# Altium PCB pcb.PcbDoc
Units mil, origin at the board's own origin, x right, y up, seen from the top; angles counter-clockwise.
Board outline 3040.03 x 1703.03 mil, 2 copper layers (Top Layer, Bottom Layer); 55 components, 53 nets, 260 pads, 285 vias.
Unrouted connection lines stored in the file: 9.
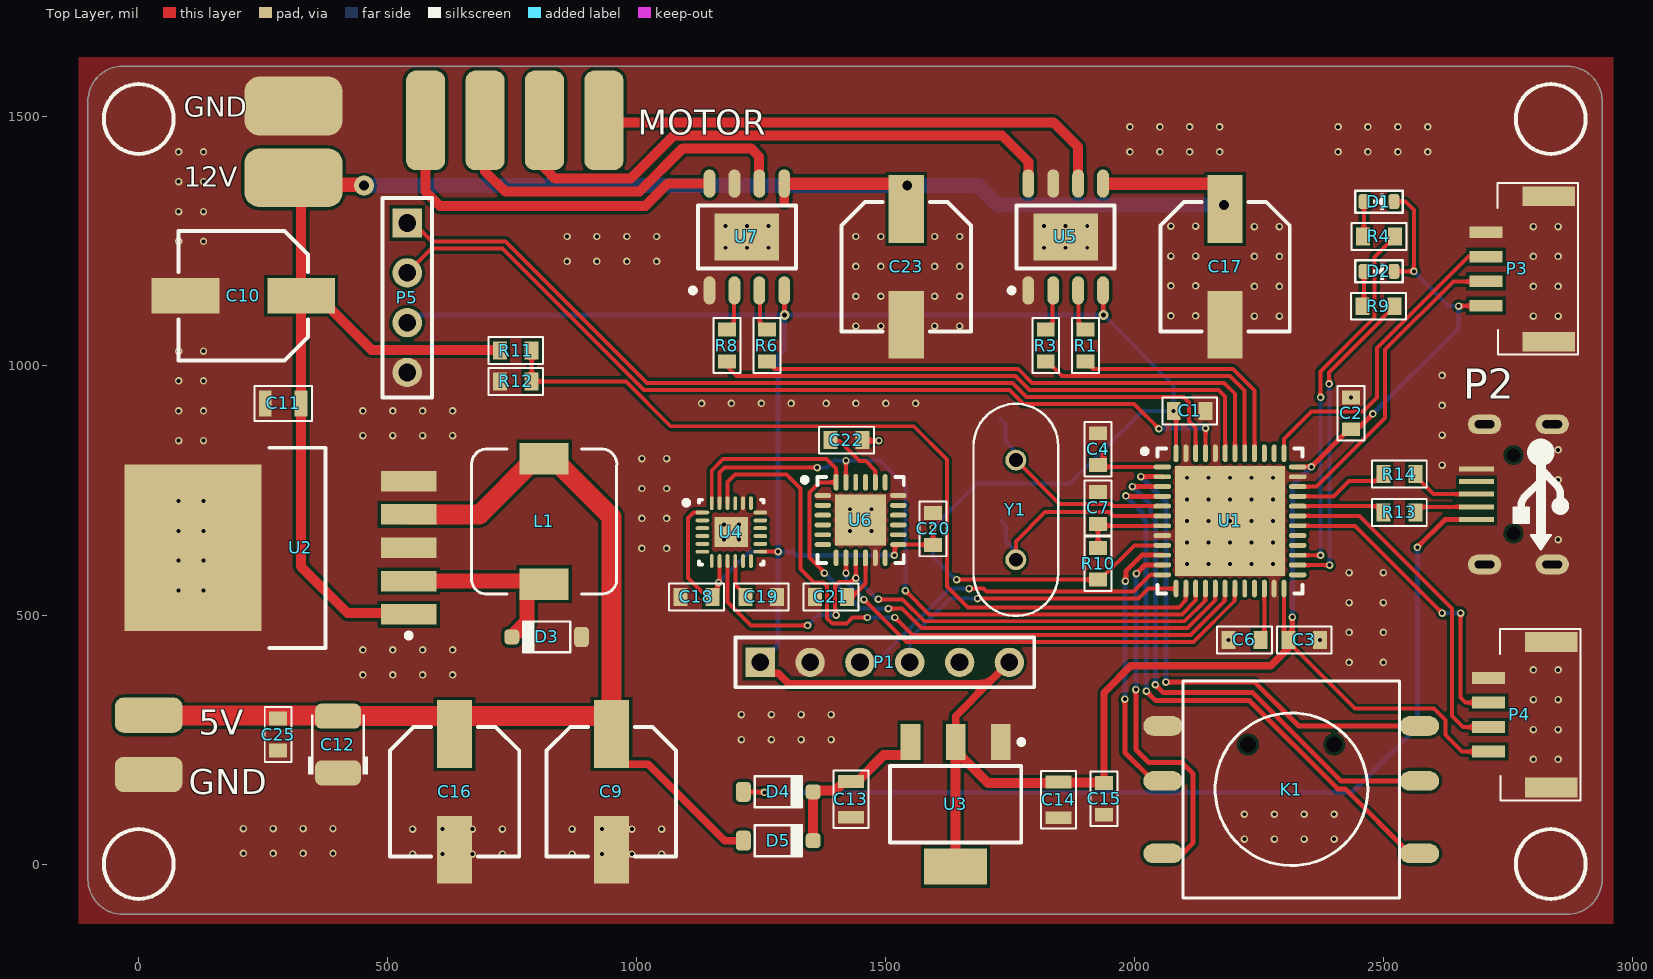
[diagram p0: Top Layer view]
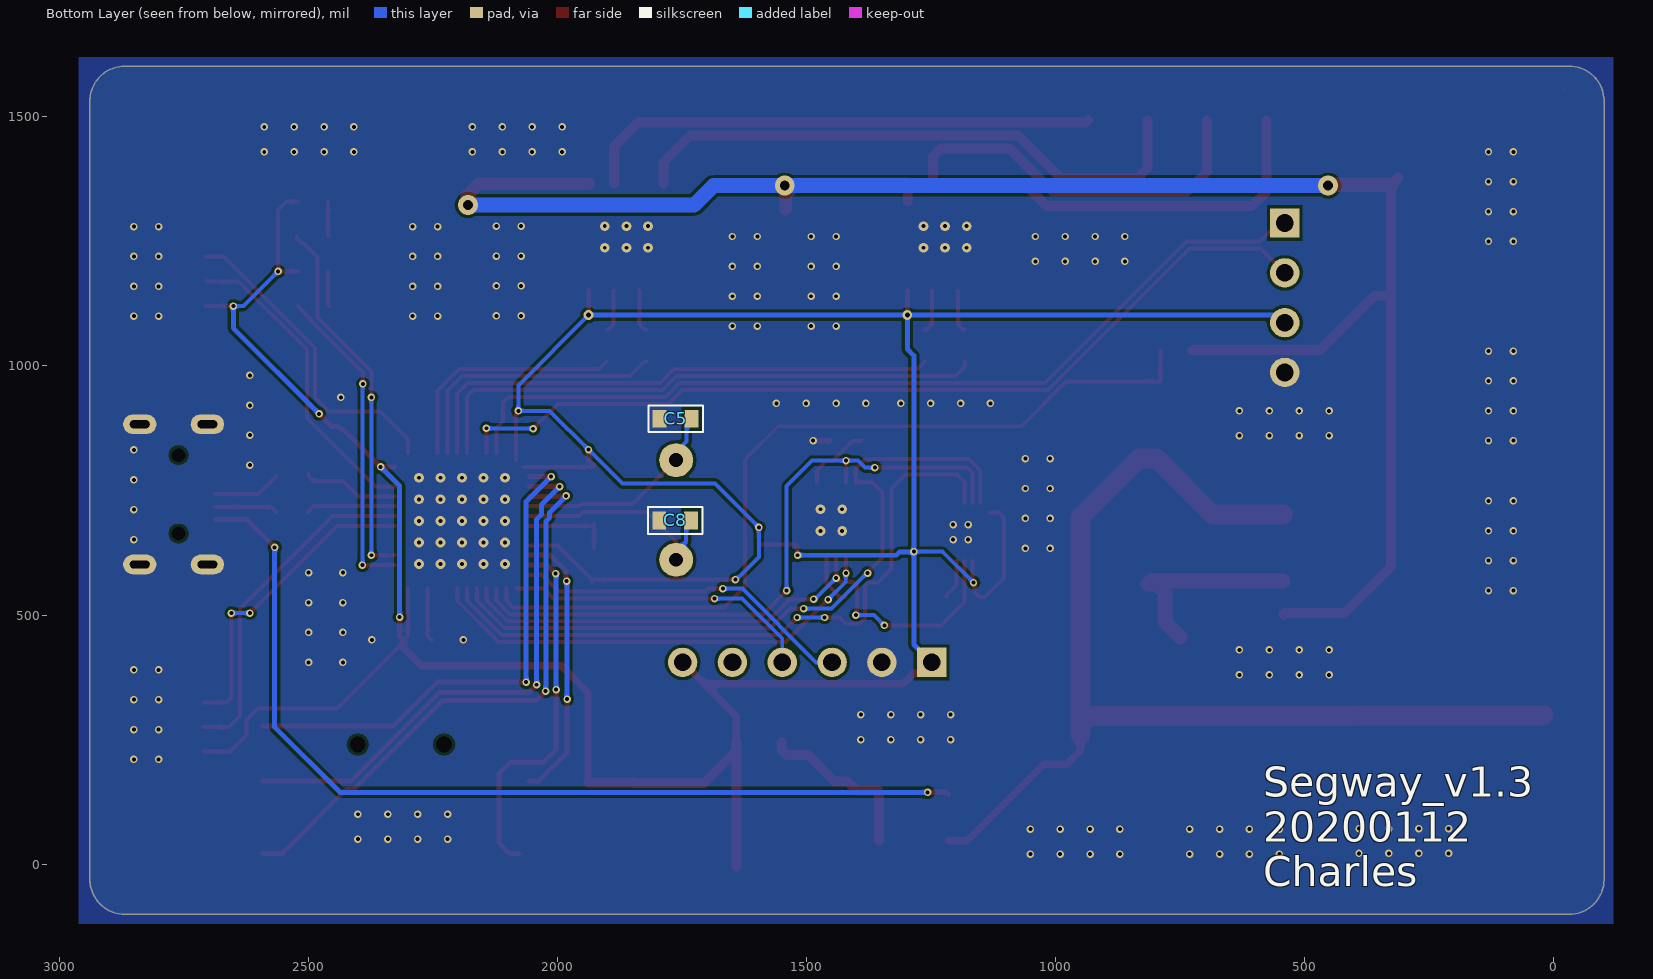
[diagram p1: Bottom Layer view, seen from below]
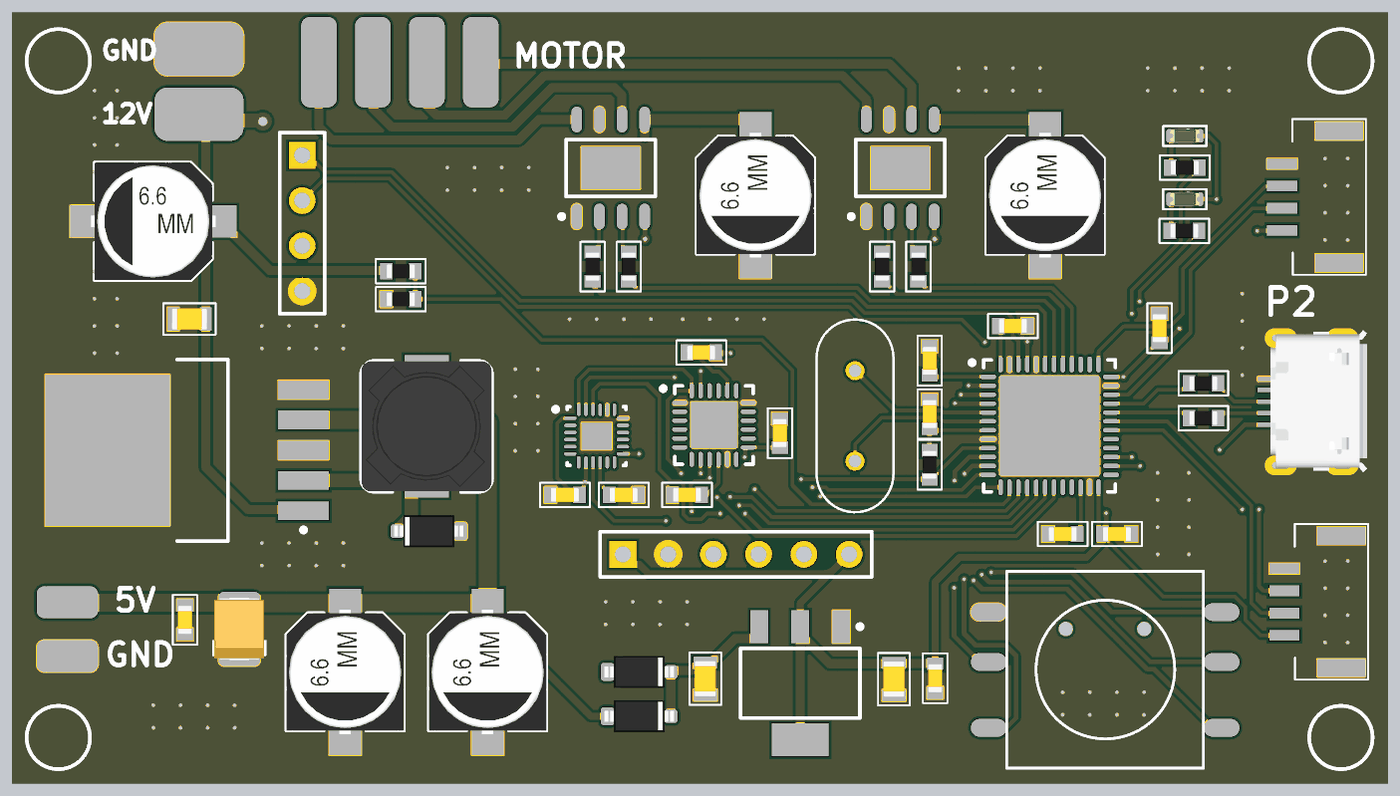
[diagram p2: 3D render of the assembled board from above, using the file's embedded part models]

## Layer stack, top to bottom
Top Solder: solder mask 0.4, Solder Resist, Dk 3.5
Top Layer: signal copper 1.4
Dielectric 1: dielectric 12.6, FR-4, Dk 4.8
Bottom Layer: signal copper 1.4
Bottom Solder: solder mask 0.4, Solder Resist, Dk 3.5

## Board outline
-102.02,-31.03 cw(c-32,-31) -102.02,-31 cw(c-99,-31) -102.02,-31 -102.02,1538 cw(c-99,1538) -101.61,1539.51 cw(c-32,1532) -32,1602.02 cw(c-32,1599) -31.97,1602.01 2868,1602.01 2868,1602.02 ccw(c2868,1599) 2867.97,1602.01 2868,1602.02 cw(c2868,1532) 2937.83,1537.03 cw(c2935,1536) 2938.02,1536 2938.02,-36 cw(c2935,-36) 2937.73,-37.27 cw(c2868,-31) 2868,-101.01 -32,-101.01 cw(c-32,-31)
cut-out: -22,1555

## Design rules (kind name [scope] priority, off if disabled: settings)
Clearance [All] p1: gap=6 ignorepadtopadclearanceinfootprint=TRUE
MinimumSolderMaskSliver [All] p1: minsoldermaskwidth=0
PolygonConnect [All] p1: connectstyle=Direct reliefconductorwidth=10 reliefentries=4 polygonreliefangle="90 Angle" airgapwidth=10
RoutingVias [All] p1: holewidth=8 width=16 viastyle="Through Hole" minholewidth=6 minwidth=12 maxholewidth=30 maxwidth=60
SilkToSilkClearance [All] p1: silktosilkclearance=1
SilkToSolderMaskClearance [IsPad] p1: minsilkscreentomaskgap=0 clearancetoexposedcopper=TRUE
SolderMaskExpansion [All] p1: expansion=2
Width [All] p1: maxlimit=50 minlimit=6 preferedwidth=8
27 further rules are at their usual default settings.

## Components (designator, comment, footprint, x,y, rotation, side; value= is the part's Value field where it differs from the comment)
C1 "CAP" CAP_0603 2110,910 r180 top value=0.1uF
C2 "CAP" CAP_0603 2434,905 r270 top value=0.1uF
C3 "CAP" CAP_0603 2340,450 r180 top value=0.1uF
C4 "CAP" CAP_0603 1926,833 r270 top value=0.1uF
C5 "CAP" CAP_0603 1762,894 r180 bottom value=20pF
C6 "CAP" CAP_0603 2220,450 r180 top value=2.2uF
C7 "CAP" CAP_0603 1926,715 r270 top value=0.1uF
C8 "CAP" CAP_0603 1763,690 r180 bottom value=20pF
C9 "470uF" "CAP ALUM 6.6MM" 949,145 r270 top value=10uF
C10 "470uF" "CAP ALUM 6.6MM" 210,1141 r180 top value=10uF
C11 "CAP" CAP_0805 290,925 r0 top value=0.1uF
C12 "CAP" CAP_TAN_B1210 400,240 r90 top value=10uF
C13 "CAP" CAP_0805 1430,130 r90 top value=0.1uF
C14 "CAP" CAP_0805 1847,129 r90 top value=200uF
C15 "CAP" CAP_0603 1938,131 r90 top value=0.1uF
C16 "470uF" "CAP ALUM 6.6MM" 634,145 r270 top value=10uF
C17 "100uF" "CAP ALUM 6.6MM" 2181,1199 r270 top
C18 "CAP" CAP_0603 1119.82,536.44 r0 top value=0.1uF
C19 "CAP" CAP_0603 1249.82,536.44 r180 top value=0.1uF
C20 "CAP" CAP_0603 1595,673 r270 top value=0.1uF
C21 "CAP" CAP_0603 1389.82,536.44 r0 top value=0.1uF
C22 "CAP" CAP_0603 1421,851 r180 top value=2.2nF
C23 "100uF" "CAP ALUM 6.6MM" 1541,1199 r270 top
C25 "CAP" CAP_0603 280,260 r90 top value=0.1uF
D1 "LED" LED_0603_GREEN 2490,1330 r180 top
D2 "LED" LED_0603_GREEN 2490,1190 r180 top
D3 "Diode" DIO_SOD-123 819,456 r180 top value=1N5819
D4 "Diode" DIO_SOD-123 1284,145 r0 top value=1N5819
D5 "Diode" DIO_SOD-123 1284,47.01 r0 top value=1N5819
K1 "BTN_NAVI" BTN_NAVI_10x10 2051.41,277.24 r0 top
L1 "IND" IND_CDRH74 814,562 r180 top value=33uH
P1 "SONIC" HDR1X6 1248,405 r0 top
P2 "USB_MICRO" USB_MICRO 2679,690.52 r270 top
P3 "CON_DEBUG_4P" CON_DEBUG_4P_STD 2705,1121 r90 top
P4 "CON_DEBUG_4P" CON_DEBUG_4P_STD 2710,225.79 r90 top
P5 "Header 4" HDR1X4 539,1287 r270 top
R1 "RES" RES_0603 1901,1041 r90 top value=2K
R3 "RES" RES_0603 1821,1041 r90 top value=2K
R4 "RES" RES_0603 2490,1260 r180 top value=10k
R6 "RES" RES_0603 1261,1041 r90 top value=2K
R8 "RES" RES_0603 1181,1041 r90 top value=2K
R9 "RES" RES_0603 2489,1120 r180 top value=10k
R10 "RES" RES_0603 1926,603 r270 top value=10K
R11 "RES" RES_0603 757,1031 r0 top value=10K
R12 "RES" RES_0603 757,969 r180 top value=2K
R13 "RES" RES_0603 2531,706 r180 top value=22
R14 "RES" RES_0603 2531,783 r180 top value=22
U1 "STM32F401CBU6" STM-UFQFPN48_N 2191,689 r0 top
U2 "LM2596" LM2596 542.07,501.14 r180 top
U3 "REG1117-3.3" TI-DCY4_N 1640,120 r270 top
U4 "MPU9250" MPU9250 1189.82,666.44 r0 top
U5 "A4950" A4950 1861,1259 r90 top
U6 "MPU6000" MPU6000 1449.35,690.65 r0 top
U7 "A4950" A4950 1221,1259 r90 top
Y1 "XTAL" XTAL_8M 1761,611 r90 top

## Footprints (in the part's own frame and the unit in brackets; to place one, negate y for a bottom-side part, rotate by r counter-clockwise, add the part's x,y. Pads: shape width x height; smd on the part's side, far side on the other; paste and mask are expansions set on the pad)
A4950 [mm] "SOIC, 8-Leads, Body 4.90x3.90mm, Pitch 1.27mm, Thermal Pad 3.30x2.40mm, IPC Medium Density"
  oval 1.45x0.6 smd: 1(-2.725,1.905) 2(-2.725,0.635) 3(-2.725,-0.635) 4(-2.725,-1.905) 5(2.725,-1.905) 6(2.725,-0.635) 7(2.725,0.635) 8(2.725,1.905)
  rect 2.4x3.3 smd: 9(0,0)
  silkscreen extent -2.85,-2.5 1.6,2.88, body extent -2,-2.5 2,2.5, height 1.7
BTN_NAVI_10x10 [mm]
  oval 2x1 smd: 1(0.127,0) 2(0.127,-2.8) 3(0.127,-6.5) 4(13.208,0) 5(13.208,-2.8) 6(13.208,-6.5)
  round 0.7 hole 0.8: 7(4.46,-0.946) 8(8.86,-0.946)
  silkscreen extent 1.14,-8.76 12.19,2.29
"CAP ALUM 6.6MM" [mm] "Aluminum Electrolytic Capacitor, Body 6.60x6.60x7.70mm, IPC Low Density"
  rect 3.45x1.8 smd: 1(-2.95,0) 2(2.95,0)
  silkscreen extent -3.3,-3.3 3.3,3.3, body extent -3.5,-3.3 3.5,3.3, height 7.7
CAP_0603 [mil]
  rect 28x36 smd: 1(-32,0) 2(32,0)
  silkscreen extent -55,-27 55,27, body extent -31,-16 32,16, height 36
CAP_0805 [mil]
  rect 26x52 smd: 1(-36,0) 2(36,0)
  silkscreen extent -58,-35 58,35, body extent -39,-24 39,24, height 50
CAP_TAN_B1210 [mil]
  rrect50% 50x92 smd: 1(-57,0) 2(57,0)
  silkscreen extent -60,-60 60,60, body extent -69,-55 69,55, height 83
CON_DEBUG_4P_STD [mm]
  rect 0.6x1.7 smd: 1(0,0) 2(1.25,0) 3(2.5,0) 4(3.75,0)
  rect 1x2.7 smd: 5(-1.829,-3.2) 5(5.588,-3.2)
  silkscreen extent -2.49,-4.7 6.26,-0.58
DIO_SOD-123 [mil]
  rrect50% 30x40 smd: 1(-70,0)
  rrect50% 30x30 smd: 2(70,0)
  silkscreen extent -47,-31 47,31, body extent -77,-35 77,35, height 46
HDR1X4 [mm] "Connector; Header; 4 Position"
  rect 1.5x1.5 hole 0.9: 1(0,0)
  round 1.5 hole 0.9: 2(2.54,0) 3(5.08,0) 4(7.62,0)
  silkscreen extent -1.27,-1.27 8.89,1.27
HDR1X6 [mm] "Connector; Header; 6 Position"
  rect 1.5x1.5 hole 0.9: 1(0,0)
  round 1.5 hole 0.9: 2(2.54,0) 3(5.08,0) 4(7.62,0) 5(10.16,0) 6(12.7,0)
  silkscreen extent -1.27,-1.27 13.97,1.27
IND_CDRH74 [mm] "DIY"
  rect 2.5x1.6 smd: 1(0,0) 2(0,-6.401)
  silkscreen extent -3.71,-6.9 3.71,0.51, body extent -3.65,-6.85 3.65,0.45, height 4.5
LED_0603_GREEN [mil]
  rrect50% 22x30 smd: 1(-30,0) 2(30,0)
  silkscreen extent -48,-22 48,22, body extent -32,-16 32,16, height 24
LM2596 [mm] "TO-263-6, D2-PAK, 6-Pads, Body 7.43x8.46mm (max), IPC Medium Density"
  rect 2.85x1.05 smd: 1(0,0) 2(0,-1.7) 3(0,-3.4) 4(0,-5.1) 5(0,-6.8)
  rect 7x8.5 smd: 6(11,-3.4)
  silkscreen extent -0.13,-8.5 7.1,1.7, body extent 4.25,-8.5 12.9,1.7, height 4.6
MPU6000 [mm] "QFN, 24-Leads, Body 4.00x4.00mm, Pitch 0.50mm, Thermal Pad 2.60x2.60mm, IPC Medium Density"
  oval 0.85x0.25 smd: 1(-1.925,1.25) 2(-1.925,0.75) 3(-1.925,0.25) 4(-1.925,-0.25) 5(-1.925,-0.75) 6(-1.925,-1.25) 13(1.925,-1.25) 14(1.925,-0.75) 15(1.925,-0.25) 16(1.925,0.25) 17(1.925,0.75) 18(1.925,1.25)
  oval 0.25x0.85 smd: 7(-1.25,-1.925) 8(-0.75,-1.925) 9(-0.25,-1.925) 10(0.25,-1.925) 11(0.75,-1.925) 12(1.25,-1.925) 19(1.25,1.925) 20(0.75,1.925) 21(0.25,1.925) 22(-0.25,1.925) 23(-0.75,1.925) 24(-1.25,1.925)
  rect 2.6x2.6 smd: 25(0,0)
  silkscreen extent -2.97,-2.2 2.2,2.2, body extent -2.05,-2.05 2.05,2.05, height 0.9
MPU9250 [mm] "QFN127P600-8N"
  oval 0.7x0.2 smd: 1(-1.475,1) 2(-1.475,0.6) 3(-1.475,0.2) 4(-1.475,-0.2) 5(-1.475,-0.6) 6(-1.475,-1) 13(1.475,-1) 14(1.475,-0.6) 15(1.475,-0.2) 16(1.475,0.2) 17(1.475,0.6) 18(1.475,1)
  oval 0.2x0.7 smd: 7(-1,-1.475) 8(-0.6,-1.475) 9(-0.2,-1.475) 10(0.2,-1.475) 11(0.6,-1.475) 12(1,-1.475) 19(1,1.475) 20(0.6,1.475) 21(0.2,1.475) 22(-0.2,1.475) 23(-0.6,1.475) 24(-1,1.475)
  rect 1.7x1.54 smd: 25(0,0)
  silkscreen extent -2.42,-1.65 1.65,1.65, body extent -1.5,-1.5 1.5,1.5, height 1
RES_0603 [mil]
  rect 28x36 smd: 1(-32,0) 2(32,0)
  silkscreen extent -55,-27 55,27, body extent -31,-16 32,16, height 20
STM-UFQFPN48_N [mm] "QFN, 48-Leads, Body 7.1x7.1mm, Pitch 0.5mm, Thermal Pad 5.6x5.6mm, IPC Medium Density"
  oval 0.9x0.25 smd: 1(-3.45,2.75) 2(-3.45,2.25) 3(-3.45,1.75) 4(-3.45,1.25) 5(-3.45,0.75) 6(-3.45,0.25) 7(-3.45,-0.25) 8(-3.45,-0.75) 9(-3.45,-1.25) 10(-3.45,-1.75) 11(-3.45,-2.25) 12(-3.45,-2.75) 25(3.45,-2.75) 26(3.45,-2.25) 27(3.45,-1.75) 28(3.45,-1.25) 29(3.45,-0.75) 30(3.45,-0.25) 31(3.45,0.25) 32(3.45,0.75) 33(3.45,1.25) 34(3.45,1.75) 35(3.45,2.25) 36(3.45,2.75)
  oval 0.25x0.9 smd: 13(-2.75,-3.45) 14(-2.25,-3.45) 15(-1.75,-3.45) 16(-1.25,-3.45) 17(-0.75,-3.45) 18(-0.25,-3.45) 19(0.25,-3.45) 20(0.75,-3.45) 21(1.25,-3.45) 22(1.75,-3.45) 23(2.25,-3.45) 24(2.75,-3.45) 37(2.75,3.45) 38(2.25,3.45) 39(1.75,3.45) 40(1.25,3.45) 41(0.75,3.45) 42(0.25,3.45) 43(-0.25,3.45) 44(-0.75,3.45) 45(-1.25,3.45) 46(-1.75,3.45) 47(-2.25,3.45) 48(-2.75,3.45)
  rect 5.6x5.6 smd: 49(0,0)
  silkscreen extent -4.47,-3.7 3.7,3.7, body extent -3.55,-3.55 3.55,3.55, height 0.6
TI-DCY4_N [mm] "SOT223, 4-Leads, Body 6.5x3.5mm, Pitch 2.3mm, IPC Medium Density"
  rect 1.85x1 smd: 1(-3.175,2.3) 2(-3.175,0) 3(-3.175,-2.3)
  rect 1.85x3.2 smd: 4(3.175,0)
  silkscreen extent -3.3,-3.35 1.95,3.48, body extent -1.85,-3.35 1.85,3.35, height 1.8
USB_MICRO [mil]
  rect 10x70 smd: 1(-1,7) 2(-26.59,7) 3(-52.18,7) 4(-77.77,7) 5(-102.18,7)
  oval 39.37x66.93 hole 15.75 slot 39.37 at 90 deg: 5(-192.5,159) 5(-192.5,23.17) 5(89,159) 5(89,23.17)
  round 0 hole 27.56: ""(-130.48,81) ""(27,81)
  silkscreen extent -146,82 58,183, body extent -210,0 104,214, height 107
XTAL_8M [mil]
  round 42 / inner round 68 / far side round 68 hole 28: 1(0,0) 2(200,0)
  silkscreen extent -113,-85 313,85

## Part data
C1 C2 C3 C4 C5 C6 C7 C8 C11 C12 C13 C14 C15 C18 C19 C20 C21 C22 C25: "Capacity"
C9 C10 C16: library part CAP_POL, "SMT Polarised Capacitor"
C17 C23: library part CAP_POL, "SMT Polarised Capacitor", Voltage=50V
L1: "Inductor"
P1: library part "Header 6", "Header, 6-Pin", LatestRevisionDate=17-Jul-2002, LatestRevisionNote="Re-released for DXP Platform.", Publisher="Altium Limited"
P5: "Header, 4-Pin", LatestRevisionDate=17-Jul-2002, LatestRevisionNote="Re-released for DXP Platform.", Publisher="Altium Limited"
R1 R3 R4 R6 R8 R9 R10 R11 R12 R13 R14: "Resister"
U1: "ARM Cortex-M4 32-bit MCU+FPU, 105 DMIPS, 128 kB Flash, 64 kB Internal RAM, 36 I/Os, 48-pin UFQFPN, -40 to 85 degC, Tray", I/Os (High Current)=36, Manufacturer=STMicroelectronics, Operating Frequency(F) (Processor speed) (MHz)=84, Supplier Part Number 1=19X6215, Supply Voltage(Vcc) max (V)=3.6, Supply Voltage(Vcc) min (V)=1.8, ComponentLink1Description="Manufacturer URL", ComponentLink1URL=http://www.st.com/web/en/home.html, ComponentLink2Description=Datasheet, ComponentLink2URL=http://www.st.com/st-web-ui/static/active/en/resource/technical/document/data_brief/DM00071938.pdf, ComponentLink3Description="Package Specification", ComponentLink3URL=http://www.st.com/st-web-ui/static/active/en/resource/technical/document/data_brief/DM00071938.pdf, Core="ARM Cortex-M4", DatasheetVersion="Rev. 1", FLASH Size (Prog) (kB)=128, Internal RAM Size (kB)=64, Mounting Technology="Surface Mount", PackageDescription="48-Pin Ultra Thin Fine Pitch Quad Flat No-Lead, 7 x 7 x 0.6 mm Body, 0.5 mm Pitch, Exposed Pad", PackageReference=UFQFPN48, PackageVersion="Rev. 1, 04/2013", Packing=Tray, PartNumber=STM32F401CBU6, Supplier 1=Newark, Supplier 2=Mouser, Supplier Part Number 2=511-STM32F401CBU6
U2: "Power"
U3: "Single Output LDO, 800 mA, Fixed 3.3 V Output, 3.8 to 15 V Input, with Internal Current Limiting, 4-pin SOT-223 (DCY), -40 to 125 degC, Green (RoHS & no Sb/Br)", Manufacturer="Texas Instruments", Rating=Catalog, Supplier Part Number 1=REG1117-3.3-ND, Code_JEDEC=TO-261, ComponentLink1Description="Manufacturer URL", ComponentLink1URL=http://www.ti.com/, ComponentLink2Description=Datasheet, ComponentLink2URL=http://www.ti.com/general/docs/lit/getliterature.tsp?genericPartNumber=REG1117-33&fileType=pdf, ComponentLink3Description="Package Specification", ComponentLink3URL=http://www.ti.com/litv/pdf/mpds094a, DatasheetVersion=SBVS001D, Eco-Plan="Green (RoHS & no Sb/Br)", Fixed Output Options(V)=5, Iout(Max)(A)=0.8, Iq(Typ)(mA)=4, Mounting Technology="Surface Mount", PackageDescription="4-Pin Plastic Small Outline, Body 3.5 x 6.5 mm, Pitch 2.3 mm", PackageReference=DCY4, PackageVersion=4202506/B, PartNumber=REG1117-3.3, SubFamily="Single Channel LDO", Supplier 1=Digi-Key, Supplier 2=Farnell, Supplier 3=Farnell, Supplier 4=Newark, Supplier 5=Mouser, Supplier Part Number 2=1212355, Supplier Part Number 3=2126471, Supplier Part Number 4=35C1963, Supplier Part Number 5=595-REG1117-3.3, Vdo(Typ)(mV)=1100, Vin(Max)(V)=15, Vin(Min)(V)=3.8, Vout Adj(Max)(V)=3.3, Vout Adj(Min)(V)=3.3
U4: "Sensor"
U5 U7: "Dual N-MOS, 40V, 3.5A."
U6: "IMU 6axis, (?????????)"
Y1: Frequency=8M

## Free pads (board coordinates)
  rrect50% 135.83x70.87 smd: ""(20,180) ""(20,299)
  rrect50% 196.85x118.11 smd: ""(311,1378) ""(311,1522)
  rrect50% 78.74x200 smd: ""(576,1493) ""(695.33,1493) ""(814.67,1493) ""(934,1493)

## Via types
v1: diameter 15, hole 8, Top Layer to Bottom Layer, tented both sides, 235 vias
v2: diameter 19.68, hole 7.87, Top Layer to Bottom Layer, tented both sides, 41 vias
v3: diameter 15, hole 7.87, Top Layer to Bottom Layer, tented both sides, 4 vias
v4: diameter 40, hole 20, Top Layer to Bottom Layer, tented both sides, 3 vias
v5: diameter 20, hole 10, Top Layer to Bottom Layer, tented both sides, 2 vias

## Nets (pads, with @x,y where several pads share a name; then routed paths per layer and width w, separated by ;. In a path a pad name is that pad's centre, name@x,y a point inside that pad or via, vN(x,y) a via of type N, cw(c..) or ccw(c..) an arc to the next point about the centre after c; other vN are vias at no path point)
ADC_BATT: R11.2 R12.1 U1.14 | length 1742.1
  Top Layer w8: R11.2 R12.1 977.9,969 1067.9,879 1556,879 1623,812 1623,557 1664.5,515.5 2088.36,515.5 2102.06,529.2 2102.06,552.82 U1.14
BTN_1: K1.2 U1.10 | length 551.6
  Top Layer w10: v1(1980,331) 1980,223.73 2036.72,167.01 K1.2 ; v1(1981,568.07) 1981.96,569.03 1981.96,588.12 2013.94,620.1 U1.10
  Bottom Layer w10: v1(1980,331) 1980.5,331.5 1980.5,567.57 v1(1981,568.07)
BTN_2: K1.3 U1.11 | length 736.2
  Top Layer w10: v1(2002,350) 2002,230 2028,204 2094,204 2117,181 2117,42.47 2095.87,21.34 K1.3@2076.18,21.34 ; v1(2003,583) 2020.42,600.42 U1.11
  Bottom Layer w10: v1(2002,350) 2002,582 v1(2003,583)
BTN_3: K1.4 U1.2 | length 1042.5
  Top Layer w10: v1(2012,778) 2012.34,777.66 2055.09,777.66 U1.2 ; v1(2062,365.16) 2240.84,365.16 2328.76,277.24 K1.4@2591.18,277.24
  Bottom Layer w10: v1(2012,778) 2062,728 v1(2062,365.16)
BTN_4: K1.5 U1.3 | length 1107.4
  Top Layer w10: v1(1995,758) 1995.05,757.95 2055.12,757.95 U1.3 ; v1(2041,360) 2056.96,344.04 2236.58,344.04 2413.62,167.01 K1.5@2591.18,167.01
  Bottom Layer w10: v1(1995,758) 2031,722 2031,702 2041,692 v1(2041,360)
BTN_5: K1.6 U1.4 | length 1185.6
  Top Layer w10: v1(1982,739) 1982.71,738.29 2055.09,738.29 U1.4 ; v1(2023,347) 2042,328 2230,328 2406.99,151.01 2422.06,151.01 2551.72,21.34 K1.6@2591.18,21.34
  Bottom Layer w10: v1(1982,739) 2015,706 2015,695.37 2022.5,687.87 2022.5,347.5 v1(2023,347)
GND: C1.1 C2.1 C3.1 C4.1 C5.1 C6.2 C7.1 C8.1 C9.2 C10.2 C11.1 C12.1 C13.1 C14.1 C15.1 C16.2 C17.2 C18.1 C19.1 C20.1 C21.1 C22.1 C23.2 C25.1 D3.1 K1.1 P1.2 P2.5 P3.4 P3.5 P4.4 P4.5 P5.4 pad.@20,180 pad.@311,1522 R12.2 U1.8 U1.23 U1.35 U1.44 U1.47 U1.49 U2.3 U2.5 U2.6 U3.1 U4.18 U4.20 U4.25 U5.1 U5.7 U5.9 U6.1 U6.11 U6.18 U6.25 U7.1 U7.7 U7.9 | length 35.1
  Top Layer w10: C22.1 1456,848 1458,850 v1(1486,850)
  other v1: 550,20 610,20 670,20 730,20 870,20 930,20 990,20 1050,20 210,21.34 270,21.34 330,21.34 390,21.34 2220,50 2280,50 2340,50 2400,50 550,70 610,70 670,70 730,70 870,70 930,70 990,70 1050,70 210,71.34 270,71.34 330,71.34 390,71.34 2220,100 2280,100 2340,100 2400,100 2800,210 2850,210 1210,250 1270,250 1330,250 1390,250 2800,270 2850,270 1210,300 1270,300 1330,300 1390,300 2800,330 2850,330 450,380 510,380 570,380 630,380 2800,390 2850,390 2430,405 2499,405 450,430 510,430 570,430 630,430 2188,450 2372,450 2430,465 2499,465 2430,525 2499,525 80,549 130,549 2430,585 2499,585 80,609 130,609 1010,634 1060,634 2850,651.44 80,669 130,669 1010,694 1060,694 2850,711.44 80,729 130,729 1010,754 1060,754 2850,771.44 2617,801 1010,814 1060,814 2850,831.44 80,850 130,850 450,860 510,860 570,860 630,860 2617,861 80,910 130,910 450,910 510,910 570,910 630,910 2617,921 1130,925 1190,925 1250,925 1310,925 1380,925 1440,925 1500,925 1560,925 2434,937 80,970 130,970 2617,981 80,1030 130,1030 1440,1080 1490,1080 1598,1080 1648,1080 2240,1100 2290,1100 2800,1100 2850,1100 2072.1,1100.65 2122.1,1100.65 1440,1140 1490,1140 1598,1140 1648,1140 2240,1160 2290,1160 2800,1160 2850,1160 2072.1,1160.65 2122.1,1160.65 1440,1200 1490,1200 1598,1200 1648,1200 860,1210 920,1210 980,1210 1040,1210 2240,1220 2290,1220 2800,1220 2850,1220 2072.1,1220.65 2122.1,1220.65 80,1250 130,1250 860,1260 920,1260 980,1260 1040,1260 1440,1260 1490,1260 1598,1260 1648,1260 2240,1280 2290,1280 2800,1280 2850,1280 2072.1,1280.65 2122.1,1280.65 80,1310 130,1310 80,1370 130,1370 80,1430 130,1430 1990,1430 2050,1430 2110,1430 2170,1430 2408,1430 2468,1430 2528,1430 2588,1430 1990,1480 2050,1480 2110,1480 2170,1480 2408,1480 2468,1480 2528,1480 2588,1480
  other v2: 2104.39,602.39 2147.69,602.39 2191,602.39 2234.31,602.39 2277.61,602.39 2104.39,645.69 2147.69,645.69 2191,645.69 2234.31,645.69 2277.61,645.69 1427.69,669 1471,669 2104.39,689 2147.69,689 2191,689 2234.31,689 2277.61,689 1427.69,712.31 1471,712.31 2104.39,732.31 2147.69,732.31 2191,732.31 2234.31,732.31 2277.61,732.31 2104.39,775.61 2147.69,775.61 2191,775.61 2234.31,775.61 2277.61,775.61 1177.69,1237.35 1221,1237.35 1264.31,1237.35 1817.69,1237.35 1861,1237.35 1904.31,1237.35 1177.69,1280.65 1221,1280.65 1264.31,1280.65 1817.69,1280.65 1861,1280.65 1904.31,1280.65
  other v3: 1174.82,651.44 1204.82,651.44 1174.82,681.44 1204.82,681.44
I2C_SCL: P5.2 U1.45 | length 1823.9
  Top Layer w8: P5.2 588,1236 730.7,1236 1014.7,952 1748.4,952 1776.4,924 1998,924 v1(2048,874) ; U1.45 2141.89,824.93 2141.89,874.89 v1(2142,875)
  Bottom Layer w8: v1(2048,874) 2048.5,874.5 2141.5,874.5 v1(2142,875)
I2C_SDA: P5.1 U1.46 | length 1826.7
  Top Layer w8: P5.1 552,1287 589,1250 736.5,1250 1020.5,966 1754.2,966 1782.2,938 2098,938 2109,927 2109,889.11 2122.1,876.01 U1.46
IMU_CLK: U1.15 U4.23 U6.23 | length 1357.2
  Top Layer w8: U4.23 1166.13,724.57 1166.13,786.13 1176,796 v1(1362,796) ; U6.23 1419.91,766.53 1419.91,809.91 v1(1420,810) ; v1(1539,549) 1586.5,501.5 2094.16,501.5 2122.1,529.44 U1.15
  Bottom Layer w8: v1(1362,796) 1382,796 1396,810 v1(1420,810) 1488,810 1539,759 v1(1539,549)
IMU_CS_1: U1.18 U4.22 | length 1377.8
  Top Layer w8: U4.22 1181.95,766.95 1197,782 1301,782 1329,754 1329,592 1355.5,565.5 1374.9,565.5 1381.82,558.58 1381.82,493.43 1392.75,482.5 1420.68,482.5 1433.18,495 v1(1463,495) ; v1(1518,495) 1553.5,459.5 2111.56,459.5 2180.8,528.75 2180.8,552.82 U1.18
  Bottom Layer w8: v1(1463,495) v1(1518,495)
IMU_CS_2: U1.19 U6.8 | length 937.9
  Top Layer w8: U6.8 1420,614.68 v1(1420,584) ; v1(1456,531) 1541.5,445.5 2117.36,445.5 2200.49,528.63 2200.49,552.82 U1.19
  Bottom Layer w8: v1(1420,584) 1420.5,583.5 1420.5,566.5 v1(1456,531)
IMU_MISO: U1.16 U4.9 U6.9 | length 1255.7
  Top Layer w8: U4.9 1181.95,526.17 1229.12,479 v1(1343,479) ; v1(1400,500) 1398.66,501.34 1398.66,513.46 1397.82,514.3 1397.82,558.58 1405.74,566.5 1430.61,566.5 1438.11,574 v1(1440,574) U6.9@1440,614.37 ; v1(1485,532) 1485.5,531.5 1533.7,531.5 1577.7,487.5 2099.96,487.5 2141.43,528.97 2141.43,552.82 U1.16
  Bottom Layer w8: v1(1343,479) 1364,500 v1(1400,500) ; v1(1440,574) 1482,532 v1(1485,532)
IMU_MOSI: U1.17 U4.24 U6.24 | length 1474.5
  Top Layer w8: U4.24 1150.45,790.45 1173.5,813.5 1380.5,813.5 1400.13,793.87 U6.24 1367.22,766.44 1346.83,746.05 1346.83,615.42 1376.63,585.63 v1(1376.63,584) ; v1(1505,513) 1532.4,513 1571.9,473.5 2105.76,473.5 2161.12,528.86 2161.12,552.82 U1.17
  Bottom Layer w8: v1(1376.63,584) 1378.25,584 1449.25,513 v1(1505,513)
LED_GREEN: R9.1 U1.26 | length 639
  Top Layer w8: U1.26 2327.04,600.21 2390.79,600.21 v1(2391,600) ; v1(2390,964) 2390,987.06 2495,1092.06 2495,1094 R9.1
  Bottom Layer w8: v1(2390,964) 2390.5,963.5 2390.5,600.5 v1(2391,600)
LED_RED: R4.1 U1.27 | length 750.7
  Top Layer w8: U1.27 2326.93,620 v1(2373,620) ; v1(2373,937) 2372.5,937.5 2372.5,989.36 2481,1097.86 2481,1219 2508,1246 2512,1246 2522,1256 R4.1
  Bottom Layer w8: v1(2373,620) v1(2373,937)
MOTOR_1A: pad.@934,1493 U5.6 | length 1047.7
  Top Layer w20: pad.@934,1493 938,1489 1837,1489 1886,1440 U5.6
MOTOR_1B: pad.@814.67,1493 U5.8 | length 1178
  Top Layer w20: pad.@814.67,1493 814.67,1397.33 835.93,1376.07 987.3,1376.07 1074.23,1463 1732.98,1463 1786.69,1409.28 1786.69,1366.98 U5.8
MOTOR_2A: pad.@695.33,1493 U7.6 | length 766.6
  Top Layer w20: pad.@695.33,1493 695.33,1390.67 735.93,1350.07 1005.3,1350.07 1092.23,1437 1229,1437 1245.31,1420.69 1245.31,1366.98 U7.6
MOTOR_2B: pad.@576,1493 U7.8 | length 743.8
  Top Layer w20: pad.@576,1493 576,1350 605,1321 1017,1321 1062.28,1366.28 U7.8
NetC5_2: C5.2 U1.5 Y1.2 | length 428.3
  Top Layer w8: Y1.2 1849,723 1951.94,723 1956.41,718.53 U1.5
  Bottom Layer w8: C5.2 1740,884 1740,848.24 1761,827.24 Y1.2
NetC6_1: C6.1 U1.22 | length 106.4
  Top Layer w8: C6.1 2259.9,457.9 U1.22
NetC8_2: C8.2 U1.6 Y1.1 | length 450.4
  Top Layer w8: Y1.1 1761,648 1820,707 1948.14,707 1956.3,698.84 U1.6
  Bottom Layer w8: C8.2 1741,680 1741,647.24 1761,627.24 Y1.1
NetC13_2: C13.2 D4.2 D5.2 U3.3 | length 344.7
  Top Layer w20: D5.2 D4.2 1357,148 1399,148 1417,166 C13.2 1443,166 1495.58,218.58 1539.76,218.58 1549.45,228.27 U3.3
NetC19_2: C19.2 U4.10 | length 80.3
  Top Layer w8: U4.10 1197.69,560.57 1217.82,540.44 C19.2
NetC21_2: C21.2 U6.10 | length 100.1
  Top Layer w8: C21.2 1432.44,536.44 1459.19,563.19 U6.10
NetC22_2: C22.2 U6.20 | length 138.8
  Top Layer w8: C22.2 1391,849 1406.86,849 1446.93,808.93 1460.07,808.93 1478.52,790.48 1478.52,766.79 U6.20
NetD1_2: D1.2 R4.2 | length 70.8
  Top Layer w8: R4.2 2460,1262 D1.2
NetD2_2: D2.2 R9.2 | length 71.2
  Top Layer w8: R9.2 2460,1123 D2.2
NetD3_2: D3.2 L1.1 U2.2 | length 417.7
  Top Layer w30: U2.2 807.93,568.07 L1.1 796.28,562 779.79,545.5 779.79,486.79 D3.2
NetP2_2: P2.2 R13.1 | length 129.3
  Top Layer w8: R13.1 2563,707.11 2573,717.11 P2.2 P2.2@2687,717.09
NetP2_3: P2.3 R14.1 | length 139
  Top Layer w8: R14.1@2563,779 2599.32,742.68 ; 2599.33,742.7 P2.3 P2.3@2687,742.68
NetR1_1: R1.1 U1.40 | length 489.1
  Top Layer w8: R1.1 1916,994 2196.76,994 2240.21,950.54 U1.40
NetR3_1: R3.1 U1.41 | length 549.4
  Top Layer w8: R3.1 1825,1009 1854,980 2190.96,980 2220.53,950.43 U1.41
NetR6_1: R6.1 U1.42 | length 1086.1
  Top Layer w8: R6.1 1276,994 1765.8,994 1793.8,966 2179.11,966 2200.84,944.27 U1.42
NetR8_1: R8.1 U1.43 | length 1149.2
  Top Layer w8: R8.1 1181,998.82 1199.82,980 1760,980 1788,952 2168,952 2181.16,938.84 U1.43
NRST: C7.2 R10.1 U1.7 | length 178.8
  Top Layer w8: R10.1 C7.2 1929.84,679.16 U1.7
PWM_1A: R1.2 U5.3 | length 87.3
  Top Layer w8: U5.3 1887,1150.72 1887,1083 1897,1073 R1.2
PWM_1B: R3.2 U5.2 | length 87.3
  Top Layer w8: R3.2 1825,1073 1835,1083 1835,1150.72 U5.2
PWM_2A: R6.2 U7.3 | length 87.3
  Top Layer w8: U7.3 1247,1150.72 1247,1083 1257,1073 R6.2
PWM_2B: R8.2 U7.2 | length 87.3
  Top Layer w8: R8.2 1185,1073 1195,1083 1195,1150.72 U7.2
SW_CLK: P3.3 U1.37 | length 644
  Top Layer w8: U1.37 2299.27,853.27 2355,909 2458.25,909 2486,936.75 2486,1036 2669.43,1219.43 P3.3
SW_D: P3.2 U1.34 | length 629.4
  Top Layer w8: U1.34 2365.04,757.9 2502.5,895.36 2502.5,1032.7 2639.33,1169.54 2704.32,1169.54 P3.2
UART1_RX: P4.2 U1.31 | length 685.1
  Top Layer w8: U1.31 2450.91,698.84 2636.5,513.25 2636.5,297.57 2659.07,275 P4.2
UART1_TX: P4.3 U1.30 | length 629.7
  Top Layer w8: U1.30 2441.84,679.16 v1(2617,504) ; v1(2654,504) 2654,334.21 2664,324.21 P4.3
  Bottom Layer w8: v1(2617,504) v1(2654,504)
UART2_RX: P1.4 U1.13 | length 623.9
  Top Layer w8: v1(1684,533) 2007,533 2027.17,553.17 U1.13
  Bottom Layer w8: P1.4 1548,452.41 1628.59,533 v1(1684,533)
UART2_TX: P1.3 U1.12 | length 684.9
  Top Layer w8: v1(1667,553) 1696,553 1702,547 1997,547 2030.73,580.73 U1.12
  Bottom Layer w8: P1.3 1480,405 1628,553 v1(1667,553)
USB_DM: R13.2 U1.32 | length 178.8
  Top Layer w8: U1.32 2489,718.53 2499,708.53 R13.2
USB_DP: R14.2 U1.33 | length 193.1
  Top Layer w8: U1.33 2399.17,738.21 2429.95,769 2489,769 2499,779 R14.2
VBUS_5: D4.1 P2.1 | length 1912.3
  Top Layer w10: D4.1@1214,140 1218.5,144.5 1255.5,144.5 v1(1256,144) ; v1(2567,636) 2622.52,691.52 P2.1
  Bottom Layer w10: v1(1256,144) 2436,144 2567,275 v1(2567,636)
VCC_3.3: C1.2 C2.2 C3.2 C4.2 C14.2 C15.2 C18.2 C20.2 D1.1 D2.1 P1.1 P1.6 P3.1 P4.1 P5.3 R10.2 U1.1 U1.9 U1.24 U1.36 U1.48 U3.2 U3.4 U4.1 U4.8 U4.13 U5.4 U6.13 U7.4 | length 8480
  Top Layer w8: U4.1 1131.69,705.75 1113.75,705.75 1103,695 1103,574 1140.56,536.44 C18.2 1161.82,546.44 1161.82,560.92 1164,563.11 v1(1164,565) ; v1@1166.2,569.09 U4.8 ; U4.13 v1(1283.65,627.07) ; v1(1517,620) 1518.34,621.34 1518.34,640.59 1519.19,641.44 U6.13 C20.2@1595,641.44 ; C20.2 C20.2@1595,641.44 ; v1(1595,676) C20.2@1595,641.44 ; v1(1642,571) R10.2 ; C4.2@1926,799 1927.73,797.27 U1.1 U1.1@2067.47,797.27 ; R10.2@1930,565 1930,571 1998.79,639.79 U1.9 ; v1(2078,910) 2082.73,905.27 U1.48 2082.73,812.53 U1.48@2081.88,811.68 ; U1.24@2299.27,553.02 2299.27,458.73 C3.2 2308,446 2442,312 2601,312 2624,289 2624,259 2657.21,225.79 P4.1 ; D2.1 v1(2560,1190) 2560,1313 2543,1330 D1.1 ; v1(2650,1120) 2650.5,1120.5 2704.5,1120.5 P3.1
  Top Layer w10: U7.4 1296.5,1151.22 1296.5,1102.5 v5(1297,1102) ; C4.2 1928,801 1937,810 v1(1937,832) ; U5.4 1936.5,1151.22 1936.5,1102.5 v5(1937,1102) ; C3.2 2316,458 v1(2316,496) ; U1.36 U1.36@2326.87,797.31 ; v1(2478,904) 2452.09,878.09 2439.09,878.09 C2.2 2430,873 v1(2354.35,797.35) ; U1.36@2326.87,797.31 v1(2354.35,797.35) v1(2354.35,797.35) ; U1.36@2326.87,797.31 2326.91,797.35 v1(2354.35,797.35)
  Top Layer w15: P1.1 1270.03,382.97 1283.97,382.97 1304.97,361.97 1704.97,361.97 ; U3.2 1640,297 1704.97,361.97 ; P1.6 1704.97,361.97 ; C15.2@1937,164 1938,165 1938,344 1992,398 2273,398 2308,433 C3.2@2308,446
  Top Layer w20: U3.4 U3.2@1640,228.27 ; U3.2 U3.2@1640,228.27 ; C14.2@1847,163 1705.27,163 U3.2@1640,228.27 ; C14.2 1848,164 C15.2@1937,164
  Bottom Layer w8: v1(1164,565) 1226.07,627.07 v1(1283.65,627.07) ; P1.1 P1.1@1272.53,429.53 ; v1(1642,571) 1641.31,570.31 1595,616.63 v1(1595,676) 1683,764 1869,764 v1(1937,832) 2015,910 v1(2078,910) 2078,961 v5(1937,1102) ; v1(2560,1190) 2630,1120 v1(2650,1120)
  Bottom Layer w10: P5.3 554,1102 v5(1297,1102) ; P1.1@1272.53,429.53 1283.65,440.65 v1(1283.65,627.07) ; v1(1517,620) 1319.11,620 1313,626.11 1284.61,626.11 v1(1283.65,627.07) ; v5(1937,1102) v5(1297,1102) ; v1(2316,496) 2316,759 v1(2354.35,797.35) ; v1(2478,904) 2650,1076 v1(2650,1120) ; v1(1283.65,627.07) 1283.65,1020.65 1297,1034 v5(1297,1102)
VCC_5: C9.1 C12.2 C16.1 C25.2 D5.1 L1.2 pad.@20,299 U2.4 | length 2246.5
  Top Layer w15: C9.1 949,228.66 976.93,200.73 1022.78,200.73 1176.5,47.01 D5.1
  Top Layer w40: pad.@20,299 21,298 280,298 399,298 C12.2 634,297 933.57,297 C9.1@949,281.57 ; U2.4 684.21,701.93 796.28,814 L1.2 831.72,814 949,696.72 949,297 C9.1@949,281.57 ; C9.1 C9.1@949,281.57
VCC_BATT: C10.1 C11.2 C17.1 C23.1 pad.@311,1378 R11.1 U2.1 U5.5 U7.5 | length 3928.1
  Top Layer w20: pad.@311,1378 325.09,1363.91 326,1363 C11.2 326,597 419,504 539.21,504 U2.1 ; C10.1 358.62,1141 467.09,1032.53 723.47,1032.53 R11.1 ; 1296,1330 U7.5@1296,1363.28
  Top Layer w25: U7.5 1518.07,1366.28 1541,1343.35 C23.1 ; U5.5@1936.69,1365.59 2158.07,1365.59 C17.1@2181,1342.66
  Top Layer w30: pad.@325.09,1363.91 450.09,1363.91 v4(452,1362)
  Bottom Layer w30: v4(452,1362) v4(1543,1362) 1686,1362 1725,1323 v4(2179,1323)
pads on no net: K1.7 K1.8 P1.5 P2. P2.4 U1.20 U1.21 U1.25 U1.28 U1.29 U1.38 U1.39 U4.2 U4.3 U4.4 U4.5 U4.6 U4.7 U4.11 U4.12 U4.14 U4.15 U4.16 U4.17 U4.19 U4.21 U6.2 U6.3 U6.4 U6.5 U6.6 U6.7 U6.12 U6.14 U6.15 U6.16 U6.17 U6.19 U6.21 U6.22

## Polygon pours and split planes (outlines as drawn)
GND on Bottom Layer "GND_L02_P004" (solid, pour order 4): -120,1620 2960,1620 2960,-120 -120,-120
GND on Top Layer "GND_L01_P006" (solid, pour order 6): -120,1620 2960,1620 2960,-120 -120,-120

## Silkscreen, mask and mechanical layers (free items; w line width, h text height)
Top Overlay:
  circle w8: c0,0 r70
  circle w8: c2835,0 r70
  circle w8: c2835,1496 r70
  circle w8: c0,1496 r70
  text "GND" at 90,1500 h40
  text "MOTOR" at 1002,1464 h50
  text "12V" at 90,1360 h40
  text "5V" at 120,260 h50
  text "GND" at 100,140 h50
Bottom Overlay:
  text "Segway_v1.3 / 20200112 / Charles" at 582,-45 h60
Mechanical 1:
  circle w6: c2834.65,1496.06 r62.99
  circle w6: c2834.65,0 r62.99
  circle w6: c0,1496.06 r62.99
  circle w6: c0,0 r62.99
  lines w6: -99,1532 cw(c-32,1532) -32,1599 2868,1599 cw(c2868,1532) 2935,1532 ; -99,1538 -99,-31 ccw(c-32,-31) -32,-98 2868,-98 ccw(c2868,-31) 2935,-31 ; 2935,-36 2935,1536